# EAGLE board SampleHolder5oa_PRODUCTION (EAGLE 5.10)
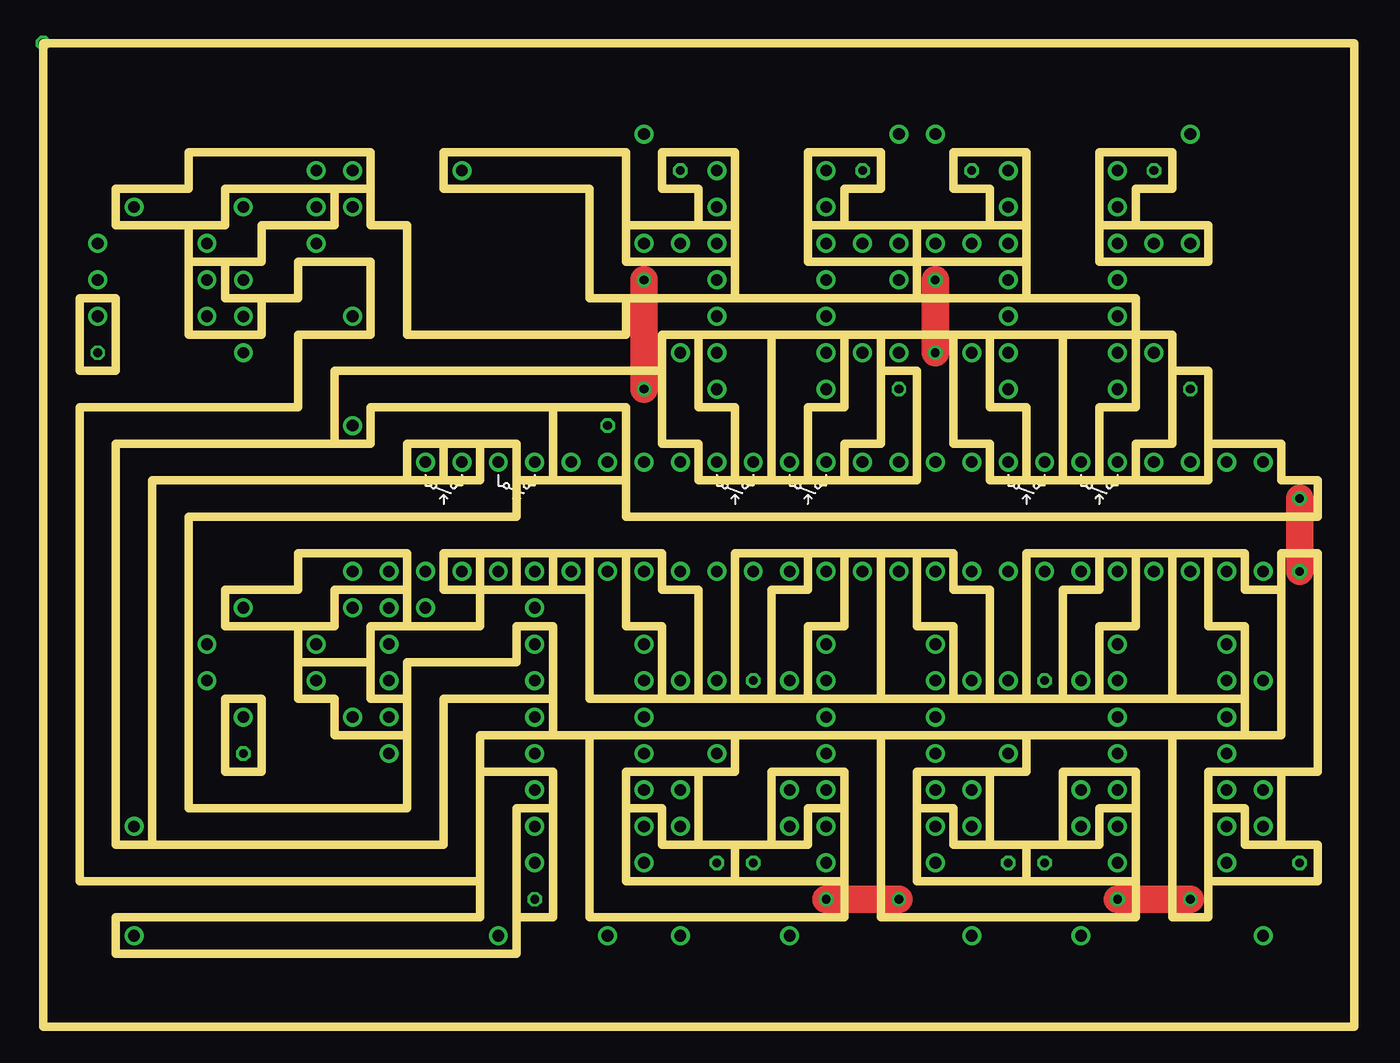
[diagram p0: board, top side]
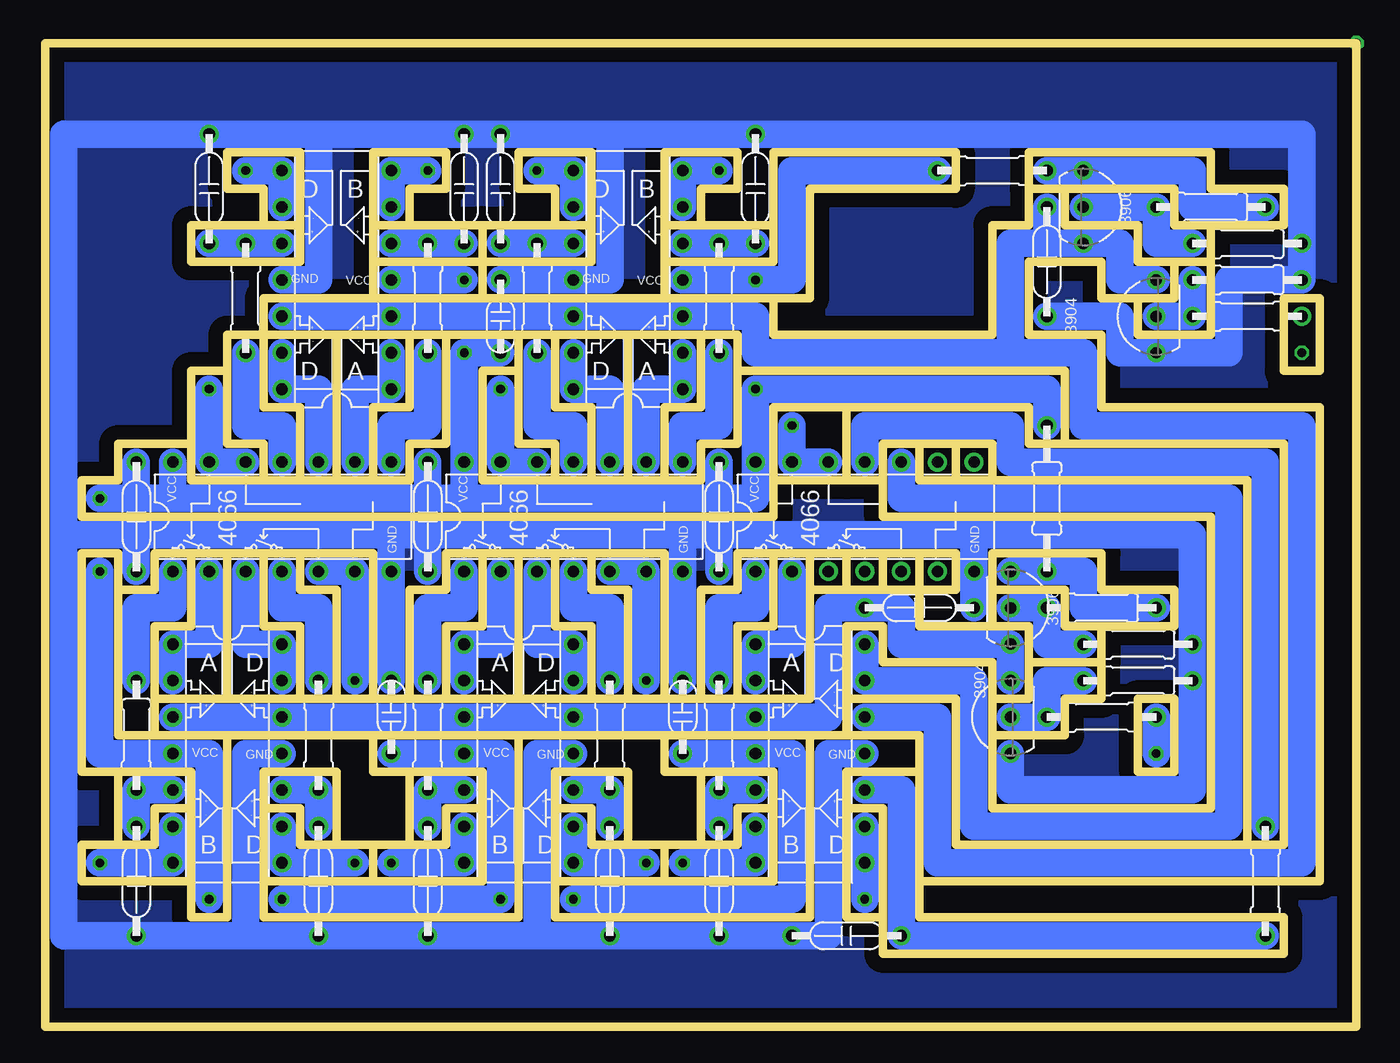
[diagram p1: board, bottom side, seen from below]

Size 91.44 x 68.58 mm. Coordinates in mm from the lower left corner, seen from the top.
Outline: 30.48,10.16 30.48,7.62 5.08,7.62 5.08,5.08 33.02,5.08 33.02,7.62
Outline: 30.48,10.16 30.48,17.78
Outline: 30.48,17.78 35.56,17.78 35.56,15.24
Outline: 35.56,15.24 33.02,15.24 33.02,7.62
Outline: 30.48,10.16 2.54,10.16 2.54,43.18 17.78,43.18 17.78,48.26 22.86,48.26 22.86,53.34 17.78,53.34 17.78,50.8 15.24,50.8
Outline: 35.56,22.86 27.94,22.86 27.94,12.7 7.62,12.7
Outline: 35.56,22.86 35.56,20.32
Outline: 35.56,20.32 30.48,20.32 30.48,17.78
Outline: 33.02,7.62 35.56,7.62 35.56,15.24
Outline: 15.24,50.8 12.7,50.8 12.7,53.34
Outline: 12.7,53.34 15.24,53.34 15.24,55.88 20.32,55.88 20.32,58.42
Outline: 20.32,58.42 22.86,58.42
Outline: 22.86,58.42 22.86,55.88 25.4,55.88 25.4,48.26 40.64,48.26 40.64,50.8
Outline: 40.64,50.8 48.26,50.8
Outline: 48.26,50.8 60.96,50.8
Outline: 60.96,50.8 68.58,50.8
Outline: 68.58,50.8 76.2,50.8 76.2,48.26
Outline: 76.2,48.26 71.12,48.26
Outline: 66.04,48.26 63.5,48.26
Outline: 63.5,48.26 58.42,48.26
Outline: 58.42,48.26 55.88,48.26
Outline: 55.88,48.26 50.8,48.26
Outline: 50.8,48.26 45.72,48.26
Outline: 45.72,48.26 43.18,48.26 43.18,45.72
Outline: 43.18,45.72 20.32,45.72 20.32,40.64
Outline: 20.32,40.64 5.08,40.64 5.08,12.7 7.62,12.7
Outline: 35.56,22.86 35.56,27.94 33.02,27.94 33.02,25.4 25.4,25.4 25.4,22.86
Outline: 25.4,22.86 25.4,20.32
Outline: 25.4,20.32 25.4,15.24 10.16,15.24 10.16,35.56 33.02,35.56 33.02,38.1
Outline: 33.02,38.1 33.02,40.64 30.48,40.64
Outline: 30.48,40.64 30.48,38.1 27.94,38.1
Outline: 27.94,38.1 25.4,38.1
Outline: 25.4,38.1 7.62,38.1 7.62,12.7
Outline: 38.1,20.32 38.1,7.62 55.88,7.62 55.88,10.16
Outline: 38.1,20.32 48.26,20.32
Outline: 48.26,20.32 48.26,17.78 45.72,17.78
Outline: 45.72,17.78 40.64,17.78 40.64,15.24
Outline: 40.64,15.24 40.64,10.16 48.26,10.16
Outline: 48.26,10.16 55.88,10.16
Outline: 48.26,10.16 48.26,12.7
Outline: 48.26,12.7 45.72,12.7
Outline: 45.72,12.7 43.18,12.7 43.18,15.24 40.64,15.24
Outline: 45.72,12.7 45.72,17.78
Outline: 48.26,12.7 50.8,12.7
Outline: 50.8,12.7 50.8,17.78 55.88,17.78 55.88,15.24
Outline: 55.88,15.24 53.34,15.24 53.34,12.7 50.8,12.7
Outline: 55.88,10.16 55.88,15.24
Outline: 68.58,20.32 68.58,17.78 66.04,17.78
Outline: 68.58,20.32 58.42,20.32
Outline: 58.42,20.32 58.42,7.62 76.2,7.62 76.2,10.16
Outline: 76.2,10.16 68.58,10.16
Outline: 68.58,10.16 60.96,10.16 60.96,15.24
Outline: 60.96,15.24 60.96,17.78 66.04,17.78
Outline: 60.96,15.24 63.5,15.24 63.5,12.7 66.04,12.7
Outline: 66.04,12.7 68.58,12.7
Outline: 68.58,12.7 68.58,10.16
Outline: 68.58,12.7 71.12,12.7
Outline: 71.12,12.7 73.66,12.7 73.66,15.24 76.2,15.24
Outline: 76.2,15.24 76.2,10.16
Outline: 76.2,15.24 76.2,17.78 71.12,17.78 71.12,12.7
Outline: 66.04,12.7 66.04,17.78
Outline: 81.28,10.16 81.28,7.62 78.74,7.62 78.74,20.32
Outline: 81.28,10.16 81.28,15.24
Outline: 81.28,15.24 81.28,17.78 86.36,17.78
Outline: 86.36,17.78 88.9,17.78 88.9,33.02 86.36,33.02 86.36,30.48
Outline: 86.36,30.48 86.36,20.32 83.82,20.32
Outline: 83.82,20.32 78.74,20.32
Outline: 81.28,15.24 83.82,15.24 83.82,12.7 86.36,12.7
Outline: 86.36,12.7 88.9,12.7 88.9,10.16 81.28,10.16
Outline: 86.36,12.7 86.36,17.78
Outline: 25.4,20.32 20.32,20.32 20.32,22.86 17.78,22.86 17.78,25.4
Outline: 17.78,25.4 22.86,25.4
Outline: 22.86,25.4 22.86,22.86 25.4,22.86
Outline: 22.86,25.4 22.86,27.94 25.4,27.94
Outline: 25.4,27.94 30.48,27.94 30.48,30.48
Outline: 30.48,30.48 33.02,30.48
Outline: 33.02,30.48 35.56,30.48
Outline: 35.56,30.48 38.1,30.48
Outline: 38.1,30.48 38.1,22.86 43.18,22.86
Outline: 43.18,22.86 45.72,22.86
Outline: 45.72,22.86 48.26,22.86
Outline: 48.26,22.86 50.8,22.86
Outline: 50.8,22.86 53.34,22.86
Outline: 53.34,22.86 58.42,22.86
Outline: 58.42,22.86 63.5,22.86
Outline: 63.5,22.86 66.04,22.86
Outline: 66.04,22.86 68.58,22.86
Outline: 68.58,22.86 71.12,22.86
Outline: 71.12,22.86 73.66,22.86
Outline: 73.66,22.86 78.74,22.86
Outline: 78.74,22.86 83.82,22.86
Outline: 83.82,22.86 83.82,20.32
Outline: 83.82,22.86 83.82,27.94 81.28,27.94 81.28,33.02
Outline: 81.28,33.02 83.82,33.02 83.82,30.48 86.36,30.48
Outline: 81.28,33.02 78.74,33.02
Outline: 78.74,33.02 78.74,22.86
Outline: 78.74,33.02 76.2,33.02
Outline: 76.2,33.02 76.2,27.94 73.66,27.94 73.66,22.86
Outline: 71.12,22.86 71.12,30.48 73.66,30.48 73.66,33.02
Outline: 73.66,33.02 76.2,33.02
Outline: 73.66,33.02 68.58,33.02 68.58,22.86
Outline: 58.42,20.32 48.26,20.32
Outline: 66.04,22.86 66.04,30.48 63.5,30.48 63.5,33.02 60.96,33.02
Outline: 60.96,33.02 60.96,27.94 63.5,27.94 63.5,22.86
Outline: 58.42,22.86 58.42,33.02
Outline: 58.42,33.02 60.96,33.02
Outline: 58.42,33.02 55.88,33.02
Outline: 55.88,33.02 55.88,27.94 53.34,27.94 53.34,22.86
Outline: 50.8,22.86 50.8,30.48 53.34,30.48 53.34,33.02
Outline: 53.34,33.02 55.88,33.02
Outline: 48.26,22.86 48.26,33.02 53.34,33.02
Outline: 38.1,30.48 38.1,33.02
Outline: 38.1,33.02 40.64,33.02
Outline: 40.64,33.02 40.64,27.94 43.18,27.94 43.18,22.86
Outline: 40.64,33.02 43.18,33.02 43.18,30.48 45.72,30.48 45.72,22.86
Outline: 38.1,33.02 35.56,33.02
Outline: 35.56,33.02 33.02,33.02
Outline: 33.02,33.02 30.48,33.02
Outline: 30.48,33.02 27.94,33.02 27.94,30.48 30.48,30.48
Outline: 30.48,30.48 30.48,33.02
Outline: 33.02,33.02 33.02,30.48
Outline: 35.56,30.48 35.56,33.02
Outline: 30.48,40.64 27.94,40.64
Outline: 27.94,40.64 25.4,40.64 25.4,38.1
Outline: 27.94,38.1 27.94,40.64
Outline: 25.4,27.94 25.4,30.48
Outline: 25.4,30.48 20.32,30.48 20.32,27.94 17.78,27.94
Outline: 17.78,27.94 17.78,25.4
Outline: 17.78,27.94 12.7,27.94 12.7,30.48 17.78,30.48 17.78,33.02 25.4,33.02 25.4,30.48
Outline: 33.02,38.1 35.56,38.1
Outline: 35.56,38.1 35.56,43.18
Outline: 35.56,43.18 22.86,43.18 22.86,40.64 20.32,40.64
Outline: 35.56,38.1 40.64,38.1
Outline: 40.64,38.1 40.64,43.18 35.56,43.18
Outline: 40.64,38.1 40.64,35.56 88.9,35.56 88.9,38.1 86.36,38.1 86.36,40.64 81.28,40.64
Outline: 81.28,40.64 81.28,38.1 76.2,38.1
Outline: 76.2,38.1 73.66,38.1
Outline: 73.66,38.1 71.12,38.1
Outline: 71.12,38.1 68.58,38.1
Outline: 68.58,38.1 66.04,38.1 66.04,40.64 63.5,40.64 63.5,48.26
Outline: 66.04,48.26 66.04,43.18 68.58,43.18 68.58,38.1
Outline: 71.12,38.1 71.12,48.26
Outline: 71.12,48.26 66.04,48.26
Outline: 81.28,40.64 81.28,45.72 78.74,45.72
Outline: 78.74,45.72 78.74,40.64 76.2,40.64 76.2,38.1
Outline: 73.66,38.1 73.66,43.18 76.2,43.18 76.2,48.26
Outline: 76.2,48.26 78.74,48.26 78.74,45.72
Outline: 58.42,45.72 60.96,45.72 60.96,38.1 55.88,38.1
Outline: 58.42,45.72 58.42,48.26
Outline: 58.42,45.72 58.42,40.64 55.88,40.64 55.88,38.1
Outline: 55.88,38.1 53.34,38.1
Outline: 53.34,38.1 50.8,38.1
Outline: 50.8,38.1 48.26,38.1
Outline: 48.26,38.1 45.72,38.1 45.72,40.64 43.18,40.64 43.18,45.72
Outline: 45.72,48.26 45.72,43.18 48.26,43.18 48.26,38.1
Outline: 50.8,38.1 50.8,48.26
Outline: 53.34,38.1 53.34,43.18 55.88,43.18 55.88,48.26
Outline: 68.58,50.8 68.58,53.34
Outline: 68.58,53.34 60.96,53.34
Outline: 60.96,53.34 60.96,50.8
Outline: 68.58,53.34 68.58,55.88
Outline: 68.58,55.88 66.04,55.88
Outline: 66.04,55.88 60.96,55.88
Outline: 60.96,55.88 60.96,53.34
Outline: 60.96,55.88 55.88,55.88
Outline: 55.88,55.88 53.34,55.88
Outline: 53.34,55.88 53.34,53.34 60.96,53.34
Outline: 55.88,55.88 55.88,58.42 58.42,58.42 58.42,60.96 53.34,60.96 53.34,55.88
Outline: 68.58,55.88 68.58,60.96 63.5,60.96 63.5,58.42 66.04,58.42 66.04,55.88
Outline: 76.2,55.88 81.28,55.88 81.28,53.34 73.66,53.34 73.66,55.88
Outline: 76.2,55.88 73.66,55.88
Outline: 76.2,55.88 76.2,58.42 78.74,58.42 78.74,60.96 73.66,60.96 73.66,55.88
Outline: 48.26,50.8 48.26,53.34
Outline: 48.26,53.34 40.64,53.34 40.64,55.88
Outline: 40.64,55.88 40.64,60.96 27.94,60.96 27.94,58.42 38.1,58.42 38.1,50.8 40.64,50.8
Outline: 48.26,53.34 48.26,55.88
Outline: 48.26,55.88 45.72,55.88
Outline: 45.72,55.88 40.64,55.88
Outline: 48.26,55.88 48.26,60.96 43.18,60.96 43.18,58.42 45.72,58.42 45.72,55.88
Outline: 12.7,53.34 10.16,53.34
Outline: 10.16,53.34 10.16,48.26 15.24,48.26 15.24,50.8
Outline: 20.32,58.42 12.7,58.42 12.7,55.88 10.16,55.88
Outline: 10.16,55.88 10.16,53.34
Outline: 10.16,55.88 5.08,55.88 5.08,58.42 10.16,58.42 10.16,60.96 22.86,60.96 22.86,58.42
Outline: 78.74,20.32 68.58,20.32
Outline: 38.1,20.32 35.56,20.32
Outline: 0,0 0,68.58 91.44,68.58 91.44,0 0,0
Outline: 12.7,17.78 15.24,17.78 15.24,22.86 12.7,22.86 12.7,17.78
Outline: 2.54,50.8 5.08,50.8 5.08,45.72 2.54,45.72 2.54,50.8
Copper layers (1*16): Top 0.035mm / dielectric 1.5mm / Bottom 0.035mm
Design rules "default": minimum track width 10mil, minimum drill 24mil, track to track 8mil, track to pad 8mil, pad to pad 8mil, via to via 8mil, smd to smd 8mil, copper to edge 40mil, drill to drill 8mil, minimum pad ring 10mil, minimum via ring 8mil, stop-mask expansion 4mil, vias tented up to drill 0mil, thermal gap 10mil

## Footprints (pad centres in the part's own frame; a part is rotated, then mirrored left to right if it is on the bottom)
SMALL-CAPACITOR = drill 0.813 round: IN1 0,0; IN2 5.08,0
RESISTOR = drill 0.813 round: IN1 -3.81,0; IN2 3.81,0
TRANSISTOR = drill 0.8 round: P$1 0,0; P$2 2.54,0; P$3 -2.54,0
LM324-QUAD-OPAMP = drill 0.813 round: AMINUS -3.81,5.08; AOUT -3.81,7.62; APLUS -3.81,2.54; BMINUS -3.81,-5.08; BOUT -3.81,-7.62; BPLUS -3.81,-2.54; CMINUS 3.81,5.08; COUT 3.81,7.62; CPLUS 3.81,2.54; DMINUS 3.81,-5.08; DOUT 3.81,-7.62; DPLUS 3.81,-2.54; GND 3.81,0; VCC -3.81,0
CAPACITOR = drill 0.813 round: IN1 -2.54,0; IN2 5.08,0
4066-QUAD-SW = drill 0.813 round: A1 -3.81,7.62; A2 -3.81,2.54; A3 3.81,-5.08; A4 3.81,0; B1 -3.81,5.08; B2 -3.81,0; B3 3.81,-7.62; B4 3.81,-2.54; C1 3.81,5.08; C2 -3.81,-2.54; C3 -3.81,-5.08; C4 3.81,2.54; GND -3.81,-7.62; VCC 3.81,7.62
RESISTOR-L2 = drill 0.813 round: IN1 -5.08,0; IN2 5.08,0

## Placement (x,y rotation side)
E$1  [SMALL-CAPACITOR]  59.69,52.07 270 bottom
E$2  [RESISTOR]  6.35,10.16 90 bottom
E$3  [TRANSISTOR]  19.05,57.15 270 bottom
E$4  [TRANSISTOR]  13.97,49.53 90 bottom
E$5  [LM324-QUAD-OPAMP]  38.1,19.05 0 bottom
E$6  2k  [RESISTOR]  10.16,57.15 0 bottom
E$7  [RESISTOR]  44.45,20.32 90 bottom
E$8  10k  [RESISTOR]  7.62,54.61 0 bottom
E$9  [CAPACITOR]  44.45,11.43 270 bottom
E$10  [4066-QUAD-SW]  54.61,35.56 90 bottom
E$11  [LM324-QUAD-OPAMP]  50.8,52.07 180 bottom
E$12  [RESISTOR]  57.15,50.8 270 bottom
E$13  [RESISTOR]  44.45,50.8 270 bottom
E$14  [CAPACITOR]  59.69,57.15 90 bottom
E$15  [4066-QUAD-SW]  34.29,35.56 90 bottom
E$16  [CAPACITOR]  36.83,6.35 0 bottom
E$17  [CAPACITOR]  41.91,57.15 90 bottom
E$18  [LM324-QUAD-OPAMP]  58.42,19.05 0 bottom
E$19  [RESISTOR]  52.07,20.32 90 bottom
E$20  [RESISTOR]  64.77,20.32 90 bottom
E$21  [CAPACITOR]  52.07,11.43 270 bottom
E$22  [CAPACITOR]  64.77,11.43 270 bottom
E$23  [4066-QUAD-SW]  74.93,35.56 90 bottom
E$24  [LM324-QUAD-OPAMP]  71.12,52.07 180 bottom
E$25  [RESISTOR]  77.47,50.8 270 bottom
E$26  [RESISTOR]  64.77,50.8 270 bottom
E$27  [CAPACITOR]  80.01,57.15 90 bottom
E$28  [CAPACITOR]  62.23,57.15 90 bottom
E$29  [LM324-QUAD-OPAMP]  78.74,19.05 0 bottom
E$30  [RESISTOR]  72.39,20.32 90 bottom
E$31  [RESISTOR]  85.09,20.32 90 bottom
E$32  [CAPACITOR]  72.39,11.43 270 bottom
E$33  [CAPACITOR]  85.09,11.43 270 bottom
E$34  [CAPACITOR]  64.77,36.83 270 bottom
E$35  [CAPACITOR]  44.45,36.83 270 bottom
E$36  [CAPACITOR]  85.09,36.83 270 bottom
E$37  [SMALL-CAPACITOR]  46.99,19.05 90 bottom
E$38  [SMALL-CAPACITOR]  67.31,19.05 90 bottom
E$39  2k  [RESISTOR]  25.4,59.69 180 bottom
E$40  [RESISTOR-L2]  21.59,36.83 90 bottom
E$41  10k  [RESISTOR]  7.62,49.53 0 bottom
E$42  10k  [RESISTOR]  7.62,52.07 0 bottom
E$43  [TRANSISTOR]  24.13,29.21 270 bottom
E$44  [TRANSISTOR]  24.13,21.59 90 bottom
E$45  2k  [RESISTOR]  17.78,29.21 0 bottom
E$46  10k  [RESISTOR]  15.24,26.67 0 bottom
E$48  [CAPACITOR]  29.21,29.21 180 bottom
E$49  10k  [RESISTOR]  17.78,21.59 0 bottom
E$50  10k  [RESISTOR]  15.24,24.13 0 bottom
E$51  [CAPACITOR]  21.59,54.61 270 bottom

## Library data of the parts
E$1-E$46 E$48-E$51 = RussellLibrary

## Nets
GND: E$1.IN1 E$4.P$3 E$5.GND E$8.IN2 E$9.IN2 E$10.GND E$11.GND E$14.IN2 E$15.GND E$16.IN1 E$17.IN2 E$18.GND E$21.IN2 E$22.IN2 E$23.GND E$24.GND E$27.IN2 E$28.IN2 E$29.GND E$32.IN2 E$33.IN2 E$34.IN2 E$35.IN2 E$36.IN2 E$37.IN2 E$38.IN2 E$42.IN2 E$44.P$3 E$46.IN2 E$48.IN1 E$50.IN2 E$51.IN2
S$1: E$2.IN1 E$5.DPLUS E$16.IN2
S$2: E$5.CMINUS E$5.COUT E$15.B4
S$3: E$49.IN2
S$4: E$3.P$1 E$6.IN1 E$8.IN1
S$5: E$2.IN2 E$15.A4
S$8: E$5.AMINUS E$5.AOUT
S$9: E$5.DMINUS E$5.DOUT
S$10: E$3.P$2 E$4.P$2 E$5.CPLUS E$11.APLUS E$11.CPLUS E$24.APLUS E$24.CPLUS E$51.IN1
S$11: E$7.IN2
S$12: E$4.P$1 E$41.IN1 E$42.IN1
S$13: E$3.P$3 E$6.IN2 E$39.IN1
S$14: E$41.IN2
S$15: E$5.BPLUS E$9.IN1
S$16: E$5.BMINUS E$5.BOUT
S$17: E$10.C2 E$10.C3
S$18: E$10.C1 E$10.C4
S$19: E$1.IN2 E$5.VCC E$10.VCC E$11.VCC E$15.VCC E$18.VCC E$23.VCC E$24.VCC E$29.VCC E$34.IN1 E$35.IN1 E$36.IN1 E$37.IN1 E$38.IN1 E$39.IN2
S$22: E$10.A3 E$11.AMINUS E$11.AOUT
S$23: E$10.B4 E$11.CMINUS E$11.COUT
S$24: E$11.BMINUS E$11.BOUT
S$26: E$10.B3 E$13.IN2
S$27: E$10.A4 E$12.IN2
S$28: E$11.DPLUS E$12.IN1 E$14.IN1
S$29: E$43.P$1 E$45.IN1 E$46.IN1
S$30: E$11.BPLUS E$17.IN1
S$31: E$5.APLUS E$18.APLUS E$18.CPLUS E$29.APLUS E$29.CPLUS E$43.P$2 E$44.P$2
S$32: E$24.BMINUS E$24.BOUT
S$33: E$18.AMINUS E$18.AOUT
S$34: E$18.CMINUS E$18.COUT
S$35: E$44.P$1 E$49.IN1 E$50.IN1
S$36: E$20.IN2
S$37: E$19.IN2
S$38: E$43.P$3 E$45.IN2
S$39: E$15.C1 E$15.C4
S$40: E$18.DPLUS E$19.IN1 E$21.IN1
S$41: E$18.DMINUS E$18.DOUT
S$44: E$18.BPLUS E$22.IN1
S$46: E$18.BMINUS E$18.BOUT
S$47: E$11.DMINUS E$11.DOUT
S$48: E$23.C2 E$23.C3
S$49: E$23.C1 E$23.C4
S$51: E$24.DMINUS E$24.DOUT
S$53: E$23.A3 E$24.AMINUS E$24.AOUT
S$54: E$23.B4 E$24.CMINUS E$24.COUT
S$56: E$23.B3 E$26.IN2
S$57: E$23.A4 E$25.IN2
S$60: E$24.DPLUS E$25.IN1 E$27.IN1
S$62: E$24.BPLUS E$28.IN1
S$65: E$29.AMINUS E$29.AOUT
S$66: E$29.CMINUS E$29.COUT
S$68: E$31.IN2
S$69: E$30.IN2
S$70: E$29.DPLUS E$30.IN1 E$32.IN1
S$71: E$29.DMINUS E$29.DOUT
S$72: E$29.BPLUS E$33.IN1
S$73: E$29.BMINUS E$29.BOUT

## Tracks (layer width: path | path; a pad name or v marks a point on that pad's centre or on a via)
GND
  Bottom 1.93: E$1.IN1 E$11.GND 52.07,52.07 52.07,62.23 | E$5.GND 36.83,19.05 36.83,6.35 E$16.IN1 E$9.IN2 E$21.IN2 57.15,6.35 | 52.07,62.23 E$17.IN2 3.81,62.23 E$8.IN2 E$42.IN2 8.89,52.07 8.89,46.99 E$4.P$3 16.51,46.99 16.51,49.53 E$51.IN2 | 26.67,34.29 E$15.GND E$48.IN1 | E$18.GND 57.15,19.05 57.15,6.35 | 26.67,34.29 44.45,34.29 | 44.45,34.29 E$35.IN2 | E$37.IN2 E$10.GND 46.99,34.29 | 52.07,62.23 E$14.IN2 E$28.IN2 72.39,62.23 | E$24.GND 72.39,52.07 72.39,62.23 | 44.45,34.29 46.99,34.29 | 57.15,6.35 E$22.IN2 E$32.IN2 77.47,6.35 | 46.99,34.29 64.77,34.29 | 64.77,34.29 E$34.IN2 | E$38.IN2 E$23.GND 67.31,34.29 | 72.39,62.23 E$27.IN2 90.17,62.23 90.17,34.29 | 64.77,34.29 67.31,34.29 | E$29.GND 77.47,19.05 77.47,6.35 | 85.09,34.29 E$36.IN2 | 67.31,34.29 85.09,34.29 | 85.09,34.29 90.17,34.29 | 77.47,6.35 E$33.IN2 90.17,6.35 90.17,34.29 | 26.67,34.29 11.43,34.29 E$46.IN2 E$50.IN2 11.43,16.51 24.13,16.51 E$44.P$3
  pour Bottom (isolate 0.305, no thermals): 91.44,0 91.44,68.58 0,68.58 0,0
S$1
  Bottom 1.93: E$5.DPLUS 31.75,16.51 E$16.IN2 E$2.IN1
S$2
  Bottom 1.93: E$5.COUT E$5.CMINUS 26.67,24.13 26.67,13.97 8.89,13.97 8.89,36.83 31.75,36.83 E$15.B4
S$3  (via drill 0.6)
  Bottom 1.93: v13.97,19.05 E$49.IN2
S$4
  Bottom 1.93: E$3.P$1 E$6.IN1 13.97,54.61 E$8.IN1
S$5
  Bottom 1.93: E$15.A4 34.29,41.91 24.13,41.91 24.13,39.37 6.35,39.37 E$2.IN2
S$6  (via drill 0.6)
  other vias: 3.81,46.99
S$8
  Bottom 1.93: E$5.AMINUS E$5.AOUT 39.37,26.67 39.37,31.75
S$9  (via drill 0.6)
  Bottom 1.93: E$5.DMINUS E$5.DOUT v34.29,8.89
S$10
  Bottom 1.93: E$4.P$2 16.51,52.07 16.51,54.61 E$3.P$2 21.59,54.61 | 21.59,54.61 24.13,54.61 24.13,46.99 | E$24.CPLUS E$24.APLUS E$11.CPLUS E$11.APLUS 41.91,49.53 41.91,46.99 24.13,46.99 | 24.13,46.99 19.05,46.99 19.05,41.91 3.81,41.91 3.81,11.43 29.21,11.43 29.21,21.59 E$5.CPLUS | 21.59,54.61 E$51.IN1
S$11
  Bottom 1.93: E$7.IN2 44.45,29.21 41.91,29.21 41.91,31.75
S$12
  Bottom 1.93: E$4.P$1 E$41.IN1 E$42.IN1
S$13
  Bottom 1.93: E$6.IN2 11.43,57.15 11.43,59.69 E$3.P$3 E$39.IN1
S$14  (via drill 0.6)
  other vias: 3.81,49.53
S$15
  Bottom 1.93: E$5.BPLUS 44.45,16.51 E$9.IN1
S$16  (via drill 0.6)
  Bottom 1.93: E$5.BMINUS E$5.BOUT v46.99,11.43
S$17  (via drill 0.6)
  Bottom 1.93: E$10.C2 E$10.C3 v49.53,24.13
S$18  (via drill 0.6)
  Bottom 1.93: E$10.C4 E$10.C1 v59.69,44.45
S$19  (via drill 0.6)
  Top 1.93: v41.91,44.45 v41.91,52.07 | v62.23,46.99 v62.23,52.07 | v87.63,31.75 v87.63,36.83 | v54.61,8.89 v59.69,8.89 | v74.93,8.89 v80.01,8.89
  Bottom 1.93: E$11.VCC v41.91,52.07 39.37,52.07 39.37,59.69 E$39.IN2 | v62.23,52.07 E$24.VCC | E$1.IN2 v62.23,46.99 E$10.VCC 62.23,36.83 | 44.45,36.83 41.91,36.83 E$15.VCC v41.91,44.45 21.59,44.45 21.59,41.91 | 44.45,36.83 E$35.IN1 | 62.23,36.83 44.45,36.83 | 64.77,36.83 62.23,36.83 | 64.77,36.83 E$34.IN1 | 82.55,36.83 E$23.VCC | 82.55,36.83 64.77,36.83 | 85.09,36.83 82.55,36.83 | 85.09,36.83 E$36.IN1 | E$37.IN1 E$5.VCC 39.37,19.05 39.37,8.89 v54.61,8.89 | v87.63,36.83 85.09,36.83 | E$38.IN1 E$18.VCC 59.69,19.05 v59.69,8.89 v74.93,8.89 | v87.63,31.75 87.63,19.05 E$29.VCC 80.01,19.05 v80.01,8.89
S$22
  Bottom 1.93: E$11.AMINUS E$11.AOUT 49.53,44.45 E$10.A3
S$23
  Bottom 1.93: E$11.CMINUS E$11.COUT 52.07,44.45 E$10.B4
S$24  (via drill 0.6)
  Bottom 1.93: E$11.BMINUS E$11.BOUT v44.45,59.69
S$25  (via drill 0.6)
  other vias: 0,68.58
S$26
  Bottom 1.93: E$13.IN2 44.45,41.91 46.99,41.91 E$10.B3
S$27
  Bottom 1.93: E$10.A4 54.61,41.91 57.15,41.91 E$12.IN2
S$28
  Bottom 1.93: E$12.IN1 E$11.DPLUS E$14.IN1
S$29
  Bottom 1.93: E$43.P$1 E$45.IN1 21.59,26.67 E$46.IN1
S$30
  Bottom 1.93: 44.45,54.61 E$11.BPLUS E$17.IN1
S$31
  Bottom 1.93: E$44.P$2 E$43.P$2 31.75,26.67 31.75,29.21 36.83,29.21 36.83,21.59 E$5.APLUS E$18.APLUS | E$29.APLUS E$29.CPLUS E$18.APLUS | E$18.APLUS E$18.CPLUS
S$32  (via drill 0.6)
  Bottom 1.93: E$24.BMINUS E$24.BOUT v64.77,59.69
S$33
  Bottom 1.93: E$18.AMINUS E$18.AOUT 59.69,26.67 59.69,31.75
S$34
  Bottom 1.93: E$18.CMINUS E$18.COUT 57.15,26.67 57.15,31.75
S$35
  Bottom 1.93: E$44.P$1 E$49.IN1 21.59,24.13 E$50.IN1
S$36
  Bottom 1.93: E$20.IN2 64.77,29.21 62.23,29.21 62.23,31.75
S$37
  Bottom 1.93: 54.61,31.75 54.61,29.21 52.07,29.21 E$19.IN2
S$38
  Bottom 1.93: E$43.P$3 19.05,31.75 19.05,29.21 E$45.IN2
S$39  (via drill 0.6)
  Bottom 1.93: E$15.C4 E$15.C1 v39.37,41.91
S$40
  Bottom 1.93: E$21.IN1 E$19.IN1 E$18.DPLUS
S$41  (via drill 0.6)
  Bottom 1.93: E$18.DMINUS E$18.DOUT v49.53,11.43
S$44
  Bottom 1.93: E$22.IN1 64.77,16.51 E$18.BPLUS
S$46  (via drill 0.6)
  Bottom 1.93: E$18.BMINUS E$18.BOUT v67.31,11.43
S$47  (via drill 0.6)
  Bottom 1.93: E$11.DMINUS E$11.DOUT v57.15,59.69
S$48  (via drill 0.6)
  Bottom 1.93: E$23.C2 E$23.C3 v69.85,24.13
S$49  (via drill 0.6)
  Bottom 1.93: E$23.C4 E$23.C1 v80.01,44.45
S$51  (via drill 0.6)
  Bottom 1.93: E$24.DMINUS E$24.DOUT v77.47,59.69
S$53
  Bottom 1.93: E$24.AMINUS E$24.AOUT 69.85,44.45 E$23.A3
S$54
  Bottom 1.93: E$24.CMINUS E$24.COUT 72.39,44.45 E$23.B4
S$56
  Bottom 1.93: E$26.IN2 64.77,41.91 67.31,41.91 E$23.B3
S$57
  Bottom 1.93: E$23.A4 74.93,41.91 77.47,41.91 E$25.IN2
S$60
  Bottom 1.93: E$24.DPLUS E$25.IN1 E$27.IN1
S$62
  Bottom 1.93: 64.77,54.61 E$24.BPLUS E$28.IN1
S$65
  Bottom 1.93: E$29.AMINUS E$29.AOUT 80.01,26.67 80.01,31.75
S$66
  Bottom 1.93: E$29.CMINUS E$29.COUT 77.47,26.67 77.47,31.75
S$68
  Bottom 1.93: E$31.IN2 85.09,29.21 82.55,29.21 82.55,31.75
S$69
  Bottom 1.93: 74.93,31.75 74.93,29.21 72.39,29.21 E$30.IN2
S$70
  Bottom 1.93: E$29.DPLUS E$30.IN1 E$32.IN1
S$71  (via drill 0.6)
  Bottom 1.93: E$29.DMINUS E$29.DOUT v69.85,11.43
S$72
  Bottom 1.93: E$33.IN1 85.09,16.51 E$29.BPLUS
S$73  (via drill 0.6)
  Bottom 1.93: E$29.BMINUS E$29.BOUT v87.63,11.43

## Text on the board
Unrouted: hst | hst
bPlace: 3906 | 3904 | 3906 | 3904